# Altium PCB PCB2.PcbDoc
Units mm, origin at the board's own origin, x right, y up, seen from the top; angles counter-clockwise.
Board outline 43.5 x 43.5 mm, 2 copper layers (Top Layer, Bottom Layer), stack 1.57 mm thick; 59 components, 40 nets, 191 pads, 67 vias.
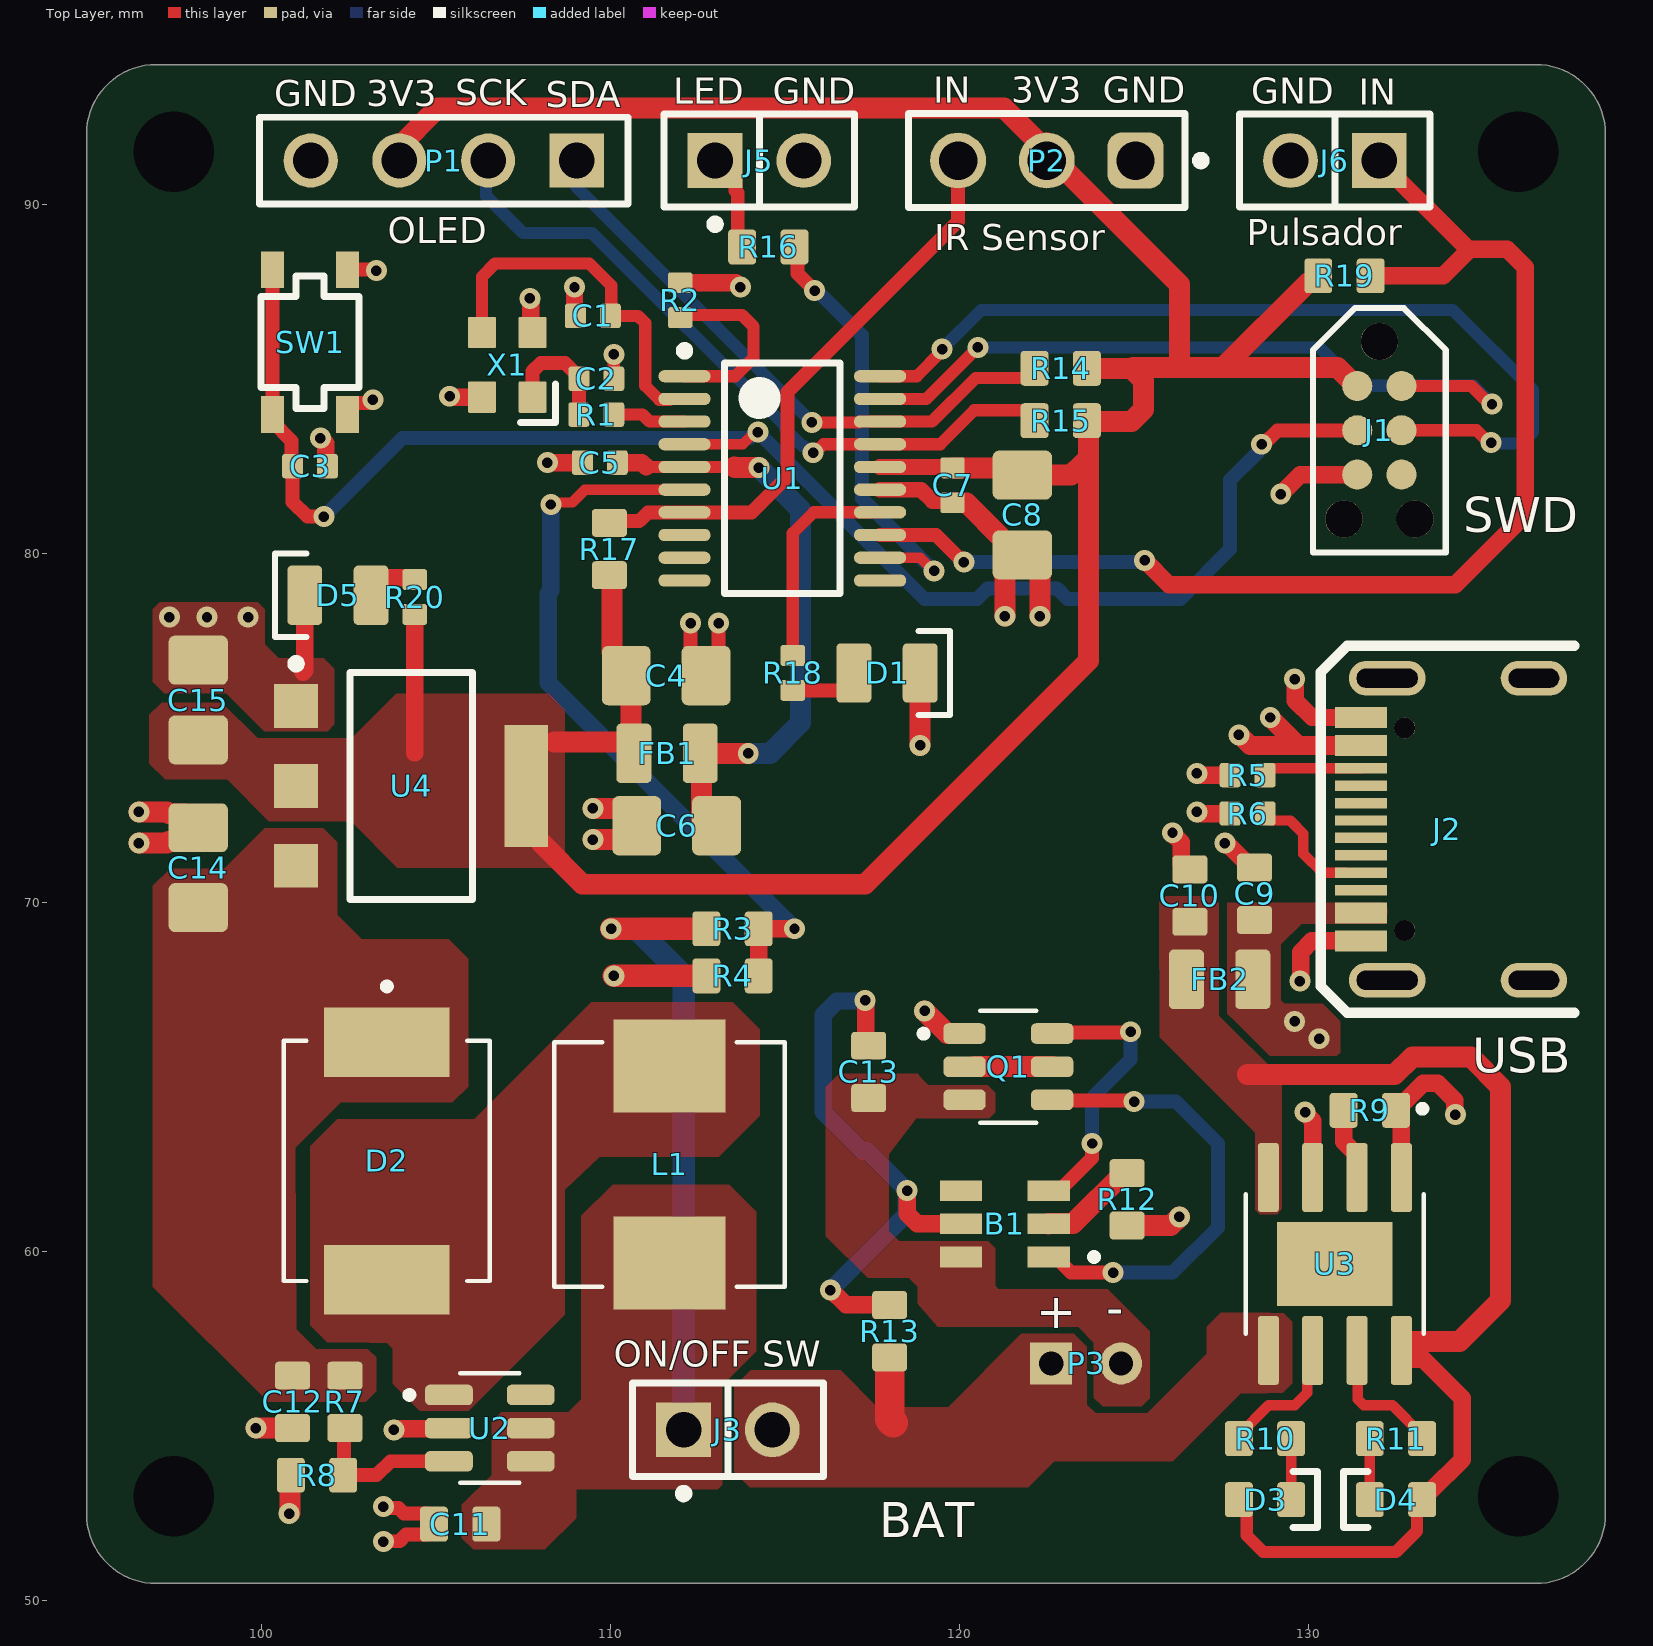
[diagram p0: Top Layer view]
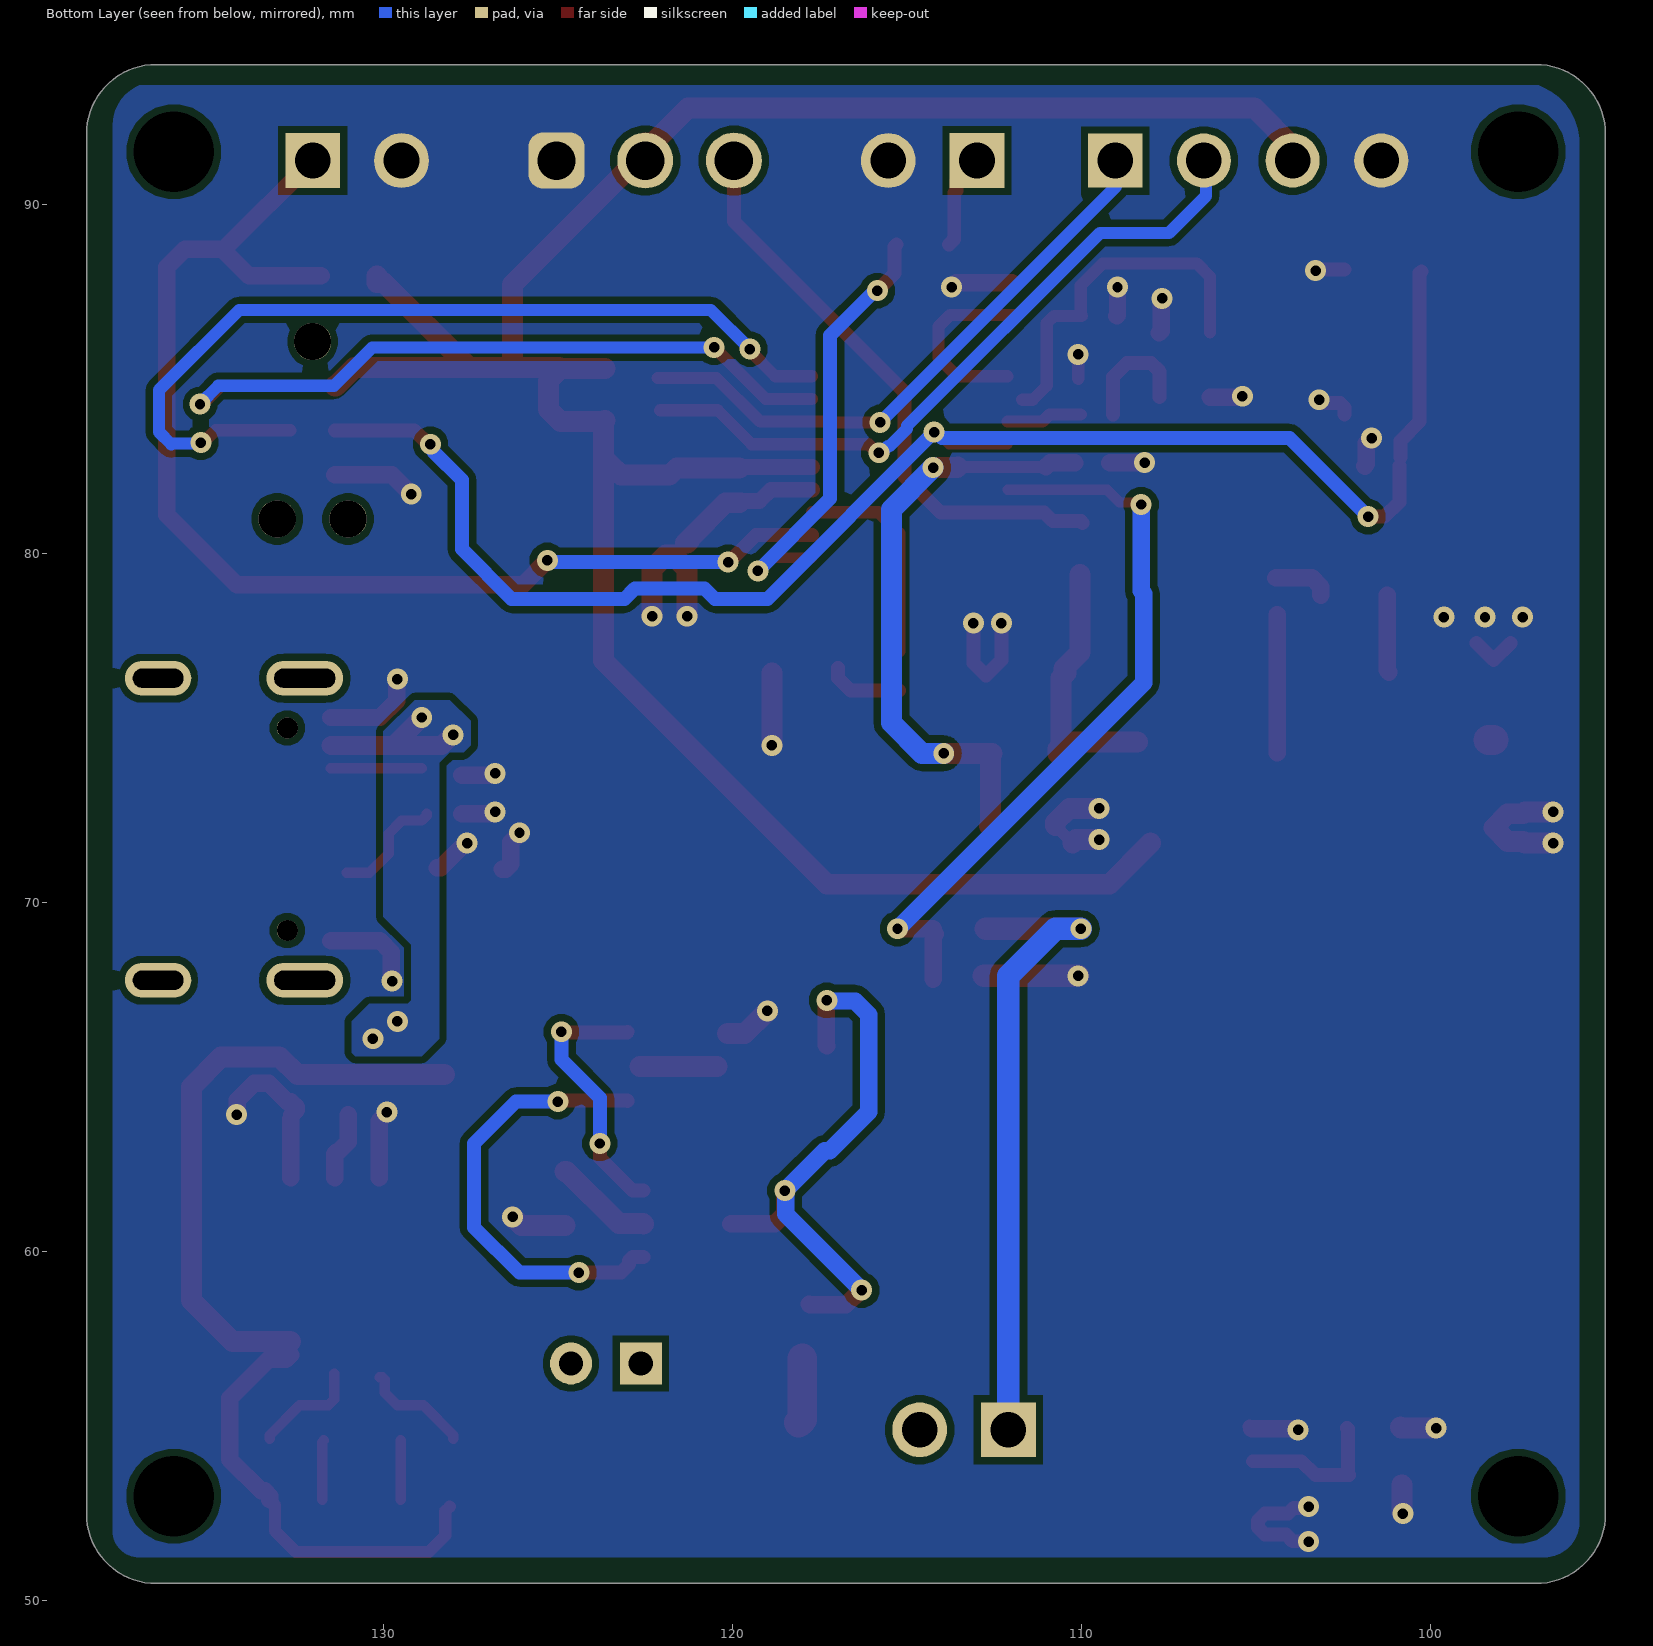
[diagram p1: Bottom Layer view, seen from below]
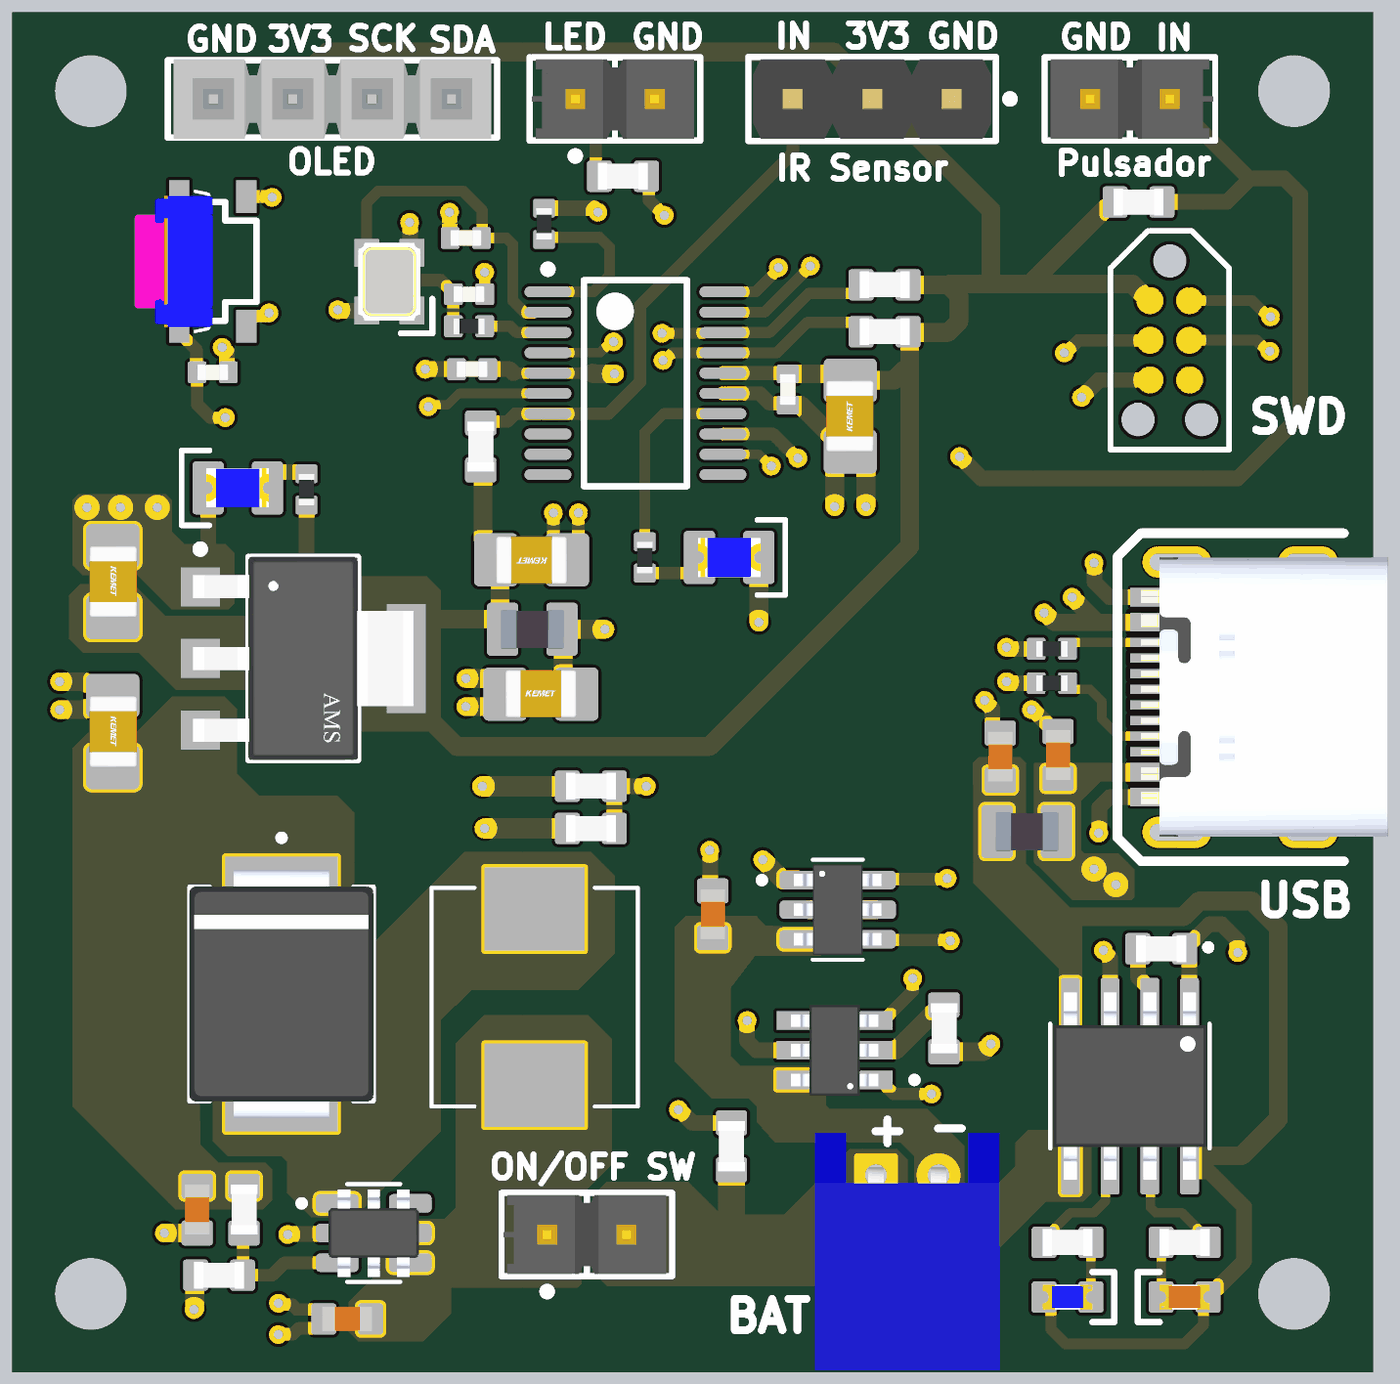
[diagram p2: 3D render of the assembled board from above, using the file's embedded part models]

## Layer stack, top to bottom
Top Solder: solder mask 0.0127, Solder Resist, Dk 3.5
Top Layer: signal copper 0.035
Dielectric 1: dielectric 1.5, FR-4, Dk 4.8
Bottom Layer: signal copper 0.035
Bottom Solder: solder mask 0.0127, Solder Resist, Dk 3.5

## Board outline
95,52.5 95,92 cw(c97,92) 97,94 136.5,94 cw(c136.5,92) 138.5,92 138.5,52.5 cw(c136.5,52.5) 136.5,50.5 97,50.5 cw(c97,52.5)

## Design rules (kind name [scope] priority, off if disabled: settings)
BoardOutlineClearance [All] p1: gap=0.2 ignorepadtopadclearanceinfootprint=FALSE
Clearance [All] p1: gap=0.2 ignorepadtopadclearanceinfootprint=FALSE
ComponentClearance [All] p1: gap=0.127 collisioncheckmode=3 verticalgap=0.127 showdistances=TRUE
DiffPairsRouting [All] p1: maxlimit=0.254 minlimit=0.127 mostfreqgap=0.127 toplayer_minwidth=0.127 toplayer_maxwidth=25.4 toplayer_prefwidth=0.127 bottomlayer_minwidth=0.127 bottomlayer_maxwidth=25.4 bottomlayer_prefwidth=0.127 maxuncoupledlength=12.7
Height [All] p1: minheight=0 maxheight=1816.048 prefheight=12.7
HoleSize [All] p1: absolutevalues=TRUE maxlimit=6.3 minlimit=0.3 maxpercent=80.000 minpercent=20.000
HoleToHoleClearance [All] p1: gap=0.25 allowstackedmicrovias=FALSE
MinimumAnnularRing [All] p1: minimumring=0.15
MinimumSolderMaskSliver [All] p1: minsoldermaskwidth=0
PlaneClearance [All] p1: clearance=0.127
PlaneConnect PlaneConnectPowerPads [InPadClass('PowerPads')] p1: planeconnectstyle=Direct reliefexpansion=0.508 reliefentries=4 reliefconductorwidth=0.254 reliefairgap=0.254
PlaneConnect [All] p2: planeconnectstyle=Direct reliefexpansion=0.3 reliefentries=4 reliefconductorwidth=0.127 reliefairgap=0.127
PolygonConnect PolygonConnectPowerPads [All vs (InPadClass('PowerPads'))] p1: connectstyle=Relief reliefconductorwidth=0.254 reliefentries=4 polygonreliefangle="90 Angle" airgapwidth=0.254
PolygonConnect [All] p2: connectstyle=Direct reliefconductorwidth=0.127 reliefentries=4 polygonreliefangle="90 Angle" airgapwidth=0.127
RoutingVias [All] p1: holewidth=0.3 width=0.6 viastyle="Through Hole" minholewidth=0.3 minwidth=0.6 maxholewidth=0.6 maxwidth=6.6
SilkToSilkClearance [All] p1: silktosilkclearance=0
SilkToSolderMaskClearance [IsPad] p1: minsilkscreentomaskgap=0.127 clearancetoexposedcopper=TRUE
SolderMaskExpansion SolderMaskExpansion_TENted [IsVia] p1: expansion=0.102 istentingtop=FALSE
SolderMaskExpansion [All] p2: expansion=0.102 istentingtop=FALSE
SupplyNets "Schematic Supply Nets_4" [InNet('+3V3A')] p1: voltage=0.000
SupplyNets "Schematic Supply Nets_3" [InNet('+5_IN')] p2: voltage=0.000
SupplyNets "Schematic Supply Nets_2" [InNet('GND')] p3: voltage=0.000
SupplyNets "Schematic Supply Nets_1" [InNet('+5')] p4: voltage=0.000
SupplyNets "Schematic Supply Nets" [InNet('+3V3')] p5: voltage=0.000
UnRoutedNet [All] p1: checkbadconnections=TRUE
Width [All] p1: maxlimit=1 minlimit=0.2 preferedwidth=0.3 minimp=50.000000 maximp=50.000000 favimp=50.000000
19 further rules are at their usual default settings.

## Classes and differential pairs
component class MCU: C1 C2 C3 C4 C5 C6 C7 C8 D1 FB1 J1 R1 R2 R3 R4 R18 SW1 U1
component class Conectors: J5 J6 P1 P2 R14 R15 R16 R17 R19
component class Battery_Management: B1 C9 C10 C11 C12 C13 C14 C15 D2 D3 D4 D5 FB2 J2 J3 L1 Q1 R5 R6 R7 R8 R9 R10 R11 R12 R13 R20 U2 U3 U4

## Components (designator, comment, footprint, x,y, rotation, side; value= is the part's Value field where it differs from the comment)
B1 "FS312F-G" SOT95P280X145-6N#1 121.3,60.8 r180 top
C1 "12 pF" CAP_0402 109.5,86.8 r180 top
C2 "12 pF" CAP_0402 109.6,85 r0 top
C3 "100 nF" CAP_0402 101.4,82.5 r0 top
C4 "1 uF" CAP_0805 111.6,76.5 r180 top
C5 "10 nF" CAP_0402 109.7,82.6 r0 top
C6 "1 uF" CAP_0805 111.9,72.2 r0 top
C7 "100 nF" CAP_0402 119.8,81.95 r90 top
C8 "1 uF" CAP_0805 121.8,81.1 r90 top
C9 "100n" CAP_0603 128.45,70.25 r270 top
C10 "100n" CAP_0603 126.6,70.2 r270 top
C11 "22u" CAP_0603 105.7,52.2 r180 top
C12 "22u" CAP_0603 100.9,55.7 r270 top
C13 "0.1u" CAP_0603 117.4,65.15 r90 top
C14 "10u" CAP_0805 98.2,71 r270 top
C15 "22u" CAP_0805 98.2,75.8 r270 top
D1 "BLUE" LED_0805_BLUE 117.925,76.575 r180 top
D2 "SS34" DIO_SS34 103.6,62.6 r270 top
D3 "BLUE" LED_0603_BLUE 128.75,52.9 r180 top
D4 "RED" LED_0603_RED 132.5,52.9 r0 top
D5 "BLUE" LED_0805_BLUE 102.2,78.8 r0 top
FB1 "120R" FB_0805 111.625,74.275 r0 top
FB2 "120R" FB_0805 127.45,67.8 r180 top
J1 "TC2030-NL" TC2030-NL-FP 132.025,83.525 r270 top
J2 "TYPE-C-31-M-12" TYPE-C-31-M-12 134.35,72.1 r90 top
J3 "TSW-102-14-G-S" FP-TSW-102-14-G-S-MFG 113.37,54.9 r0 top
J5 "TSW-102-14-G-S" FP-TSW-102-14-G-S-MFG 114.27,91.25 r0 top
J6 "TSW-102-14-G-S" FP-TSW-102-14-G-S-MFG 130.75,91.25 r180 top
L1 "MWSA0603S-220MT" INDM7066X300N 111.7,62.5 r90 top
P1 "HMTSW-104-23-F-S-237" SMTC-HMTSW-104-23-X-S-237 109.04,91.25 r180 top
P2 "61300311121" 61300311121 122.5,91.25 r180 top
P3 "S2B-PH-K-S(LF)(SN)" JST-S2B-PH-K-S_V 123.625,54.35 r0 top
Q1 "FS8205" SOT95P280X145-6N#2 121.4,65.3 r0 top
R1 "0R" RES_0402 109.6,83.975 r180 top
R2 "100K" RES_0402 112,87.25 r90 top
R3 "100k" RES_0603 113.5,69.25 r180 top
R4 "100k" RES_0603 113.5,67.9 r0 top
R5 "5.1k" RES_0402 128.25,73.65 r0 top
R6 "5.1k" RES_0402 128.25,72.55 r0 top
R7 "160k" RES_0603 102.4,55.7 r90 top
R8 "22K" RES_0603 101.6,53.6 r0 top
R9 "1.3K" RES_0603 131.75,64.05 r180 top
R10 "1K" RES_0603 128.75,54.65 r0 top
R11 "1K" RES_0603 132.5,54.65 r180 top
R12 "2K" RES_0603 124.8,61.5 r90 top
R13 "100" RES_0603 118,57.725 r270 top
R14 "4.7K" RES_0603 122.9,85.3 r0 top
R15 "4.7K" RES_0603 122.9,83.8 r0 top
R16 "120" RES_0603 114.525,88.775 r180 top
R17 "12K" RES_0603 109.975,80.125 r90 top
R18 "270R" RES_0402 115.225,76.575 r270 top
R19 "4.7K" RES_0603 131.025,87.95 r0 top
R20 "270R" RES_0402 104.4,78.75 r90 top
SW1 "SKRPANE010" SKRPANE010 101.4,86.05 r90 top
U1 "STM32F030F4P6" STM-TSSOP20_L 114.925,82.15 r0 top
U2 "MT3608" SOT95P280X145-6N#3 106.55,54.95 r0 top
U3 "TP4056" SOP127P600X175-9N 130.75,59.65 r270 top
U4 "AMS1117-3.3" FP-AMS1117-IPC_C 104.295,73.34 r0 top
X1 "12 MHZ" XTAL_2520 107.05,85.4 r90 top

## Footprints (in the part's own frame and the unit in brackets; to place one, negate y for a bottom-side part, rotate by r counter-clockwise, add the part's x,y. Pads: shape width x height; smd on the part's side, far side on the other; paste and mask are expansions set on the pad)
61300311121 [mm] "Pin Header, pitch 2.54 mm, THT, Vertical, single row, 3p"
  rrect50% 1.6x1.6 hole 1.1: 1(-2.54,0)
  round 1.6 hole 1.1: 2(0,0) 3(2.54,0)
  silkscreen extent -4.53,-1.35 3.96,1.35, body extent -3.81,-1.27 3.81,1.27, height 8.57
CAP_0402 [mm]
  rrect25% 0.6x0.7 smd: 1(-0.5,0) 2(0.5,0)
  body extent -0.5,-0.26 0.5,0.26, height 0.37
CAP_0603 [mm]
  rrect25% 0.8x1 smd: 1(-0.75,0) 2(0.75,0)
  body extent -0.8,-0.4 0.8,0.4, height 0.51
CAP_0805 [mm]
  rrect25% 1.4x1.7 smd: 1(-1.143,0) 2(1.143,0)
  body extent -1.15,-0.76 1.15,0.79, height 1.01
DIO_SS34 [mm]
  rect 2x3.6 smd: A(3.4,0) C(-3.4,0)
  silkscreen extent -5.1,-2.95 3.44,2.95, body extent -3.98,-2.95 3.98,2.95, height 2.65
FB_0805 [mm]
  rrect25% 1x1.7 smd: 1(-0.95,0) 2(0.95,0)
  body extent -1,-0.63 1,0.63, height 0.86
FP-AMS1117-IPC_C [mm]
  rect 1.25x1.25 smd paste+0 mask+0: 1(-3.295,2.29) 2(-3.295,0) 3(-3.295,-2.29)
  rect 1.25x3.5 smd paste+0 mask+0: 4(3.295,0)
  silkscreen extent -3.42,-3.25 1.75,3.62, body extent -3.9,-3.35 3.9,3.35, height 0.25
FP-TSW-102-14-G-S-MFG [mm]
  rect 1.57x1.57 hole 1.02 paste-2539.97 mask+0: 1(-1.27,0)
  round 1.57 hole 1.02 paste-2539.97 mask+0: 2(1.27,0)
  silkscreen extent -2.73,-1.95 2.73,1.34, body extent -2.83,-1.44 2.83,1.44, height 0.25
INDM7066X300N [mm]
  rect 2.67x3.21 smd: 1(-2.82,0) 2(2.82,0)
  silkscreen extent -3.5,-3.3 3.5,3.3
JST-S2B-PH-K-S_V [mm] "THD, 2-Leads, Body 7.6x5.9mm, Pitch 2mm"
  rect 1.2x1.2 hole 0.7: 1(-1,2.45)
  round 1.2 hole 0.7: 2(1,2.45)
  body extent -2.95,-3.8 2.95,3.8, height 4.8
LED_0603_BLUE [mm]
  rrect25% 0.8x1 smd: A(0.75,0) K(-0.75,0)
  silkscreen extent -1.5,-0.8 -0.8,0.8, body extent -0.8,-0.4 0.8,0.4, height 0.6
LED_0603_RED [mm]
  rrect25% 0.8x1 smd: A(0.75,0) K(-0.75,0)
  silkscreen extent -1.5,-0.8 -0.8,0.8, body extent -0.8,-0.4 0.8,0.4, height 0.6
LED_0805_BLUE [mm]
  rrect25% 1x1.7 smd: A(0.95,0) K(-0.95,0)
  silkscreen extent -1.8,-1.2 -0.9,1.2, body extent -1,-0.63 1,0.63, height 1.12
RES_0402 [mm]
  rrect25% 0.6x0.7 smd: 1(-0.5,0) 2(0.5,0)
  body extent -0.5,-0.25 0.5,0.25, height 0.3
RES_0603 [mm]
  rrect25% 0.8x1 smd: 1(-0.75,0) 2(0.75,0)
  body extent -0.8,-0.43 0.8,0.43, height 0.52
SKRPANE010 [mm]
  rect 1.05x0.65 smd: 12(-2.075,1.075) 12(2.075,1.075) 34(-2.075,-1.075) 34(2.075,-1.075)
  silkscreen extent -1.9,-1.4 1.9,1.4, body extent -2.3,-1.6 2.3,1.6, height 2.51
SMTC-HMTSW-104-23-X-S-237 [mm] "Terminal Strip, 1x2 Pins, Vertical, 2.54mm Pitch, Male"
  rect 1.55x1.55 hole 1.02: 1(0,0)
  round 1.55 hole 1.02: 2(2.54,0) 3(5.08,0) 4(7.62,0)
  silkscreen extent -1.46,-1.24 9.08,1.24, body extent -1.27,-1.27 8.89,1.27, height 8.56
SOP127P600X175-9N [mm]
  rrect25% 1.97x0.6 smd: 1(-2.475,1.905) 2(-2.475,0.635) 3(-2.475,-0.635) 4(-2.475,-1.905) 5(2.475,-1.905) 6(2.475,-0.635) 7(2.475,0.635) 8(2.475,1.905)
  rect 2.413x3.302 smd paste-3: 9(0,0)
  silkscreen extent -4.54,-2.55 2,2.6, body extent -3,-2.45 3,2.45, height 1.75
SOT95P280X145-6N#1 [mm]
  rect 1.21x0.59 smd: 1(-1.255,0.95) 2(-1.255,0) 3(-1.255,-0.95) 4(1.255,-0.95) 5(1.255,0) 6(1.255,0.95)
  silkscreen extent -2.66,0.85 -2.46,1.05, body extent -1.4,-1.45 1.4,1.45, height 1.45
SOT95P280X145-6N#2 [mm]
  rrect50% 1.21x0.59 smd: 1(-1.255,0.95) 2(-1.255,0) 3(-1.255,-0.95) 4(1.255,-0.95) 5(1.255,0) 6(1.255,0.95)
  silkscreen extent -2.53,-1.6 0.8,1.6, body extent -1.4,-1.45 1.4,1.45, height 1.45
SOT95P280X145-6N#3 [mm]
  rrect50% 1.37x0.59 smd: 1(-1.17,0.95) 2(-1.17,0) 3(-1.17,-0.95) 4(1.17,-0.95) 5(1.17,0) 6(1.17,0.95)
  silkscreen extent -2.4,-1.57 0.85,1.57, body extent -1.45,-1.4 1.45,1.4, height 1.45
STM-TSSOP20_L [mm] "SOP, 20-Leads, Body 6.6x4.5mm, Pitch 0.65mm, IPC High Density"
  oval 1.5x0.35 smd: 1(-2.8,2.925) 2(-2.8,2.275) 3(-2.8,1.625) 4(-2.8,0.975) 5(-2.8,0.325) 6(-2.8,-0.325) 7(-2.8,-0.975) 8(-2.8,-1.625) 9(-2.8,-2.275) 10(-2.8,-2.925) 11(2.8,-2.925) 12(2.8,-2.275) 13(2.8,-1.625) 14(2.8,-0.975) 15(2.8,-0.325) 16(2.8,0.325) 17(2.8,0.975) 18(2.8,1.625) 19(2.8,2.275) 20(2.8,2.925)
  silkscreen extent -2.92,-3.3 1.65,3.77, body extent -2.25,-3.3 2.25,3.3, height 1.2
TC2030-NL-FP [mil]
  round 33.98 smd paste-16.99: 1(-50,-25) 2(-50,25) 3(0,-25) 4(0,25) 5(50,-25) 6(50,25)
  round 42.01 hole 42.01 unplated: MH(-100,0) MH(100,40) MH(100,-40)
  silkscreen extent -138,-75 138,75
TYPE-C-31-M-12 [mm]
  rect 0.6x1.5 smd mask+0.07: A1B12(-3.2,2.85) B1A12(3.2,2.85)
  rect 0.6x1.5 smd mask+0.14: A4B9(-2.4,2.85) B4A9(2.4,2.85)
  rect 0.3x1.5 smd mask+0.14: A5(-1.25,2.85) A6(-0.25,2.85) A7(0.25,2.85) A8(1.25,2.85) B5(1.75,2.85) B6(0.75,2.85) B7(-0.75,2.85) B8(-1.75,2.85)
  round 0.6 hole 0.6 unplated mask+0.3: MH(-2.9,1.6) MH(2.9,1.6)
  oval 1x1.9 hole 0.55 slot 1.45 at 90 deg mask+0.05: SH(-4.325,-2.1) SH(4.325,-2.1)
  oval 1x2.2 hole 0.55 slot 1.75 at 90 deg mask+0.05: SH(-4.325,2.1) SH(4.325,2.1)
  silkscreen extent -5.25,-3.25 5.25,4, body extent -4.47,-4.65 4.47,3.25, height 3.32
XTAL_2520 [mm]
  rrect10% 0.9x0.8 smd mask+0: 1(-0.925,-0.725) 2(0.925,-0.725) 3(0.925,0.725) 4(-0.925,0.725)
  silkscreen extent -1.65,-1.37 -0.55,-0.37, body extent -1.25,-1 1.25,1, height 0.8

## Part data
B1: "One Cell Lithium-ion/Polymer Battery Protection IC", Manufacturer_Name="Fortune Semiconductor Corporation", Datasheet Link=https://www.ic-fortune.com/upload/Download/FS312F-G-DS-12_EN.pdf, Geometry.Height=1.45mm, Manufacturer_Part_Number=FS312F-G
C1 C2 C3 C5 C7: library part CAP_0402, "Capacitor SMD 0402"
C4 C6 C8 C14 C15: library part CAP_0805, "Capacitor SMD 0805"
C9 C10 C11 C12 C13: library part CAP_0603, "Capacitor SMD 0603"
D1 D5: library part LED_0805_BLUE, "LED 0805 BLUE SMD"
D2: "3A, 40V, Schottky Rectifier", Package="DO-214AB-2 Taiwan Semiconductor", Check_prices=https://www.snapeda.com/parts/SS34/Taiwan+Semiconductor/view-part/?ref=eda, MF="Taiwan Semiconductor", MP=SS34, SnapEDA_Link=https://www.snapeda.com/parts/SS34/Taiwan+Semiconductor/view-part/?ref=snap
D3: library part LED_0603_BLUE, "LED 0603 BLUE SMD"
D4: library part LED_0603_RED, "LED 0603 RED SMD"
FB1: library part FB_0805, "Ferrite Bead SMD 0805GZ2012D121TF", Manufacturer Part Number=PZ2012D121-3R0TF
FB2: library part FB_0805, "Ferrite Bead SMD 0805", Manufacturer Part Number=PZ2012D121-3R0TF
J1: "Tag-Connect No-Solder SWD Debug Connector (No Legs) DO NOT PLACE", Manufacturer=Tag-Connect, Manufacturer Part Number=TC2030-NL-FP
J2: "USB Type C Connector Horizontal SMT", Manufacturer="Koren Hroparts", Manufacturer Part Number=TYPE-C-31-M-12
J3 J5 J6: library part CMP-02766-001740-1, "CONN HEADER VERT 2POS 2.54MM", Color=Black, Flammability Rating="UL94 V-0", Max Current Rating=7.6A, Max Operating Temperature=125°C, Max Voltage Rating (AC)=550V, Min Operating Temperature=-55°C, Package Quantity=1, Connector Type=Header, Contact Finish - Mating=GOLD, Contact Material=Bronze, Contact Mating Length=0.32inch, Contact Plating=Gold, Contact Shape=Square, Contact Type="Male Pin", Depth=2.54mm, Fastening Type=Pull, Gender=Male, Housing Color=Black, Housing Material=Polyester, Insulation Color=Black, Insulation Material=PBT, Lead Free="Lead Free", Length=5.08mm, Mount="Through Hole", Number of Contacts=2, Number of Positions=2, Number of Rows=1, Orientation=Straight, Packaging=Bulk, Pitch=2.54mm, Radiation Hardening=No, REACH SVHC="No SVHC", RoHS Compliant=Yes, Series=TSW, Termination=Solder, Width=2.54mm
L1: "22 ÂµH Unshielded Drum Core, Wirewound Inductor 2.5 A 170mOhm Max Nonstandard -", Package=None, Check_prices=https://www.snapeda.com/parts/MWSA0603S-220MT/Shenzhen+Huacan+Tianlu+Electronics+Co.%252C+Ltd./view-part/?ref=eda, MF="Shenzhen Sunlord Electronics Co., Ltd.", MP=MWSA0603S-220MT, SnapEDA_Link=https://www.snapeda.com/parts/MWSA0603S-220MT/Shenzhen+Huacan+Tianlu+Electronics+Co.%252C+Ltd./view-part/?ref=snap
P1: library part CMP-1024-00021-1, "Modified .025\" SQ Post Header, Through-hole, Vertical, -55 to 125 degC, 2.54 mm Pitch, 4-Pin, Male, RoHS", Manufacturer=Samtec, Temperature Range="-55 to 125 degC", ComponentLink1Description="Manufacturer URL", ComponentLink1URL=http://www.samtec.com, ComponentLink2Description=Datasheet, ComponentLink2URL=http://www.samtec.com/documents/webfiles/pdf/HMTSW.PDF, ComponentLink3Description="Package Specification", ComponentLink3URL=http://www.samtec.com/documents/webfiles/cpdf/HMTSW-XXX-XX-X-X-XXXX-XX-XX-MKT1.pdf, DatasheetVersion=F-214, Mounting Technology=Through-hole, Orientation=Vertical, PackageDescription="Assembly .025 [.64] SQ. Post Hi-Temp Terminal Strip", PackageReference=HMTSW-104-23-X-S-237, PackageVersion="AL, 3/1987", PartNumber=HMTSW-104-23-F-S-237, Pitch="2.54 mm", RoHS=True
P2: library part CMP-1502-01062-3, Color=Black, Contact Resistance=20mΩ, Current Rating=3A, Max Operating Temperature=105°C, Min Operating Temperature=-40°C, Operating Supply Voltage=250V, Connector Type="Male Pin", Contact Material=Copper, Contact Mating Length=5.9944mm, Contact Plating=Gold, Gender=Male, Height=8.94mm, Lead Free="Lead Free", Lead Pitch=2.54mm, Mount="Through Hole", NexarPartId=32855521, Number of Contacts=3, Number of Pins=3, Number of Positions=3, Number of Rows=1, Orientation=Vertical, Packaging=Bulk, Pitch=2.54mm, REACH SVHC=Unknown, RoHS=Compliant, Termination=Solder, Voltage Rating=250V
P3: library part CMP-1755-00004-1, "Male Header, Pitch 2 mm, 1 x 2 Position, Height 4.8 mm, Tail Length 3.4 mm, -25 to 85 degC, RoHS, Bulk", Capacitance="10 uF", Case\Package=Radial, Max Operating Temperature="85 degC", Min Operating Temperature="-40 degC", Package Quantity=200, Tolerance=20%, Voltage Rating="50 V", ComponentLink1Description=Datasheet, ComponentLink1URL=http://www.jst-mfg.com/product/pdf/eng/ePH.pdf, DatasheetVersion=Dec-12, Diameter="5 mm", Height="11 mm", Lead Pitch="2 mm", Length="11 mm", Mount="Through Hole", PackageDescription="Male Header, Pitch 2 mm, 1 x 2 Position, Height 4.8 mm, Tail Length 3.4 mm", PackageReference=S2B-PH-K-S, Packaging=Bulk, Pins=2, Radiation Hardening=No, REACH SVHC="No SVHC", RoHSCompliant=true, Voltage Rating (DC)="50 V"
Q1: "ÐœÐžÐŸ-Ñ‚Ñ€Ð°Ð½Ð·Ð¸ÑÑ‚Ð¾Ñ€ Ñ Ð´Ð²Ð¾Ð¹Ð½Ñ‹Ð¼ N-ÐºÐ°Ð½Ð°Ð»ÑŒÐ½Ñ‹Ð¼ Ñ€ÐµÐ¶Ð¸Ð¼Ð¾Ð¼ ÑƒÑÐ¸Ð»ÐµÐ½Ð¸Ñ Ð¼Ð¾Ñ‰Ð½Ð¾ÑÑ‚Ð¸", Package=Package, Check_prices=https://www.snapeda.com/parts/FS8205/Fortune+Semiconductor/view-part/?ref=eda, MF="Fortune Semiconductor", MP=FS8205, SnapEDA_Link=https://www.snapeda.com/parts/FS8205/Fortune+Semiconductor/view-part/?ref=snap
R1 R2 R5 R6 R18 R20: library part RES_0402, "Resistor SMD 0402"
R3 R4 R7 R8 R9 R10 R11 R12 R13 R14 R15 R16 R17 R19: library part RES_0603, "Resistor SMD 0603"
SW1: "Tactile Switch SMD SPST", Manufacturer="Alps Alpine", Manufacturer Part Number=SKRPANE010
U1: library part CMP-0304-00039-2, "ARM Cortex-M0 32-bit MCU, 16 KB Flash, 4 KB Internal RAM, 15 I/Os, 20-pin TSSOP, -40 to 85 degC, Tube", I/Os (High Current)=15, Operating Frequency(F) (Processor speed) (MHz)=48, Supply Voltage(Vcc) min (V)=2.4, ComponentLink1Description="Manufacturer URL", ComponentLink1URL=http://www.st.com/web/en/home.html, ComponentLink2Description=Datasheet, ComponentLink2URL=http://www.st.com/st-web-ui/static/active/en/resource/technical/document/datasheet/DM00088500.pdf, ComponentLink3Description="Package Specification", ComponentLink3URL=http://www.st.com/st-web-ui/static/active/en/resource/technical/document/datasheet/DM00065136.pdf, Core="ARM Cortex-M0", DatasheetVersion="Rev. 1", FLASH Size (Prog) (kB)=16, Internal RAM Size (kB)=4, Mounting Technology="Surface Mount", PackageDescription="20-Pin Thin Shrink Small Outline Package, 6.5 x 4.4 mm Body, 0.65 mm Pitch", PackageReference=TSSOP20, PackageVersion="Rev. 1, 11/2012", Packing=Tube, PartNumber=STM32F030F4P6
U2: "High Efficiency 1.2MHz2A Step Up Converter", Package=Package, Availability="Not in stock", Check_prices=https://www.snapeda.com/parts/MT3608/Aerosemi+Technology+Co.%252C+Ltd/view-part/?ref=eda, MF="Aerosemi Technology Co., Ltd", MP=MT3608, Price=None, SnapEDA_Link=https://www.snapeda.com/parts/MT3608/Aerosemi+Technology+Co.%252C+Ltd/view-part/?ref=snap
U3: "Complete single cell Li-Ion battery with a constant current / constant voltage linear charger", Package=Package, Availability="Not in stock", Check_prices=https://www.snapeda.com/parts/TP4056/NanJing+Top+Power+ASIC+Corp./view-part/?ref=eda, MF="NanJing Top Power ASIC Corp.", MP=TP4056, Price=None, SnapEDA_Link=https://www.snapeda.com/parts/TP4056/NanJing+Top+Power+ASIC+Corp./view-part/?ref=snap
U4: library part CMP-209535-000001-1, "LDO Voltage Regulators 1A, 3.3V", Dropout Voltage=1.1V, Manufacturer="Advanced Monolithic Systems", Max Junction Temp=+125°C, Max Power Dissipation=1.2W, Max Supply Voltage=15V, Nominal Supply Current=5mA, Output Current=1A, Output Voltage=3.3V, Package=AMS1117, Temperature="-40°C to +125°C", Temperature Range Low=-40°C, Automotive=No, Category=IC, ComponentLink2Description=Datasheet, ComponentLink2URL=http://www.advanced-monolithic.com/pdf/ds1117.pdf, Device Class L1="Integrated Circuits (ICs)", Device Class L2="Power Management ICs", Device Class L3="Voltage Regulators - Linear", Height=1.8mm, Ipc Land Pattern Name=SOT229P700X180-4, Lead Free=Yes, Manufacturer Part Number=AMS1117-3.3, Number Of Outputs=1, Octopart=https://octopart.com/ams1117-3.3-advanced+monolithic+systems-25899300, Output Type=Fixed, RoHS=TRUE, Standoff Height=0.64mm, Temperature Range High=+125°C
X1: library part XTAL_2520, "Crystal SMD 2520", Manufacturer Part Number=HY12MSMD2520FA1R30

## Free pads (board coordinates)
  round 1.524 hole 2.3 unplated: MH(97.5,53) MH(97.5,91.5) MH(136,53) MH(136,91.5)

## Via types
v1: diameter 0.6, hole 0.3, Top Layer to Bottom Layer, 67 vias

## Nets (pads, with @x,y where several pads share a name; then routed paths per layer and width w, separated by ;. In a path a pad name is that pad's centre, name@x,y a point inside that pad or via, vN(x,y) a via of type N, cw(c..) or ccw(c..) an arc to the next point about the centre after c; other vN are vias at no path point)
+3V3: C4.2 C7.2 C8.2 C15.2 FB1.1 J1.1 P1.3 P2.2 R14.2 R15.2 R17.1 R19.1 R20.1 U1.16 U4.2 U4.4 | length 85.6
  Top Layer w0.45: U1.16 C7.2@119.775,82.475
  Top Layer w0.5: 104.4,74.284 R20.1
  Top Layer w0.6: P1.3@103.9,91.6 105.05,92.75 121.276,92.75 122.276,91.75 P2.2@122.521,91.75 ; U4.4@108.025,71.7 109.2,70.525 117.3,70.525 123.7,76.925 123.7,83.75 R15.2@123.675,83.775 ; 108.4,74.6 110.475,74.6 110.675,74.4 FB1.1 110.591,74.359 110.591,76.434 C4.2@110.45,76.575 ; R17.1@110.05,79.4 110.05,77.157 110.507,76.7 C4.2@110.507,76.55 ; C7.2 121.593,82.45 C8.2 123.199,82.243 123.55,82.594 ; P2.2@122.5,91.5 126.3,87.7 126.3,85.525 ; R15.2 R15.2@123.675,83.775 ; R14.2 124.924,85.3 124.937,85.287 125.275,84.949 125.275,84.126 124.924,83.775 R15.2@123.675,83.775 ; 124.975,85.325 126.35,85.325 127.55,85.325 ; R19.1@130.175,87.95 130.175,87.75 129.975,87.75 127.55,85.325 ; J1.1 131.362,84.795 130.832,85.325 127.55,85.325
  Top Layer w0.85: C15.2 C15.2@98.35,74.657
+3V3A: C5.2 C6.2 FB1.2 U1.5 | length 17.3
  Top Layer w0.35: 111.025,82.475 U1.5 113.575,82.475 113.6,82.5
  Top Layer w0.5: C5.2 110.9,82.6 111.025,82.475
  Top Layer w0.6: C6.2@112.643,72.2 112.609,72.234 112.609,74.241 FB1.2 v1(113.95,74.275) ; 113.55,82.475 113.57,82.455 v1(114.255,82.455)
  Bottom Layer w0.6: v1(113.95,74.275) 114.575,74.275 115.45,75.15 115.45,81.26 v1(114.255,82.455)
+5: C12.1 C14.2 D2.C R7.2 U4.3
+5_IN: C10.2 D3.A D4.A FB2.2 U3.4 U3.8 | length 30.1
  Top Layer w0.35: D3.A@128.1,52.7 128.225,52.575 128.225,51.875 128.7,51.4 132.5,51.4 133.1,52 133.1,52.75 D4.A
  Top Layer w0.5: U3.8@132.655,57.05 132.78,56.925 133.275,56.925 134.4,55.8 134.4,54.05 133.5,53.15 133.4,53.15 133.25,53 D4.A
  Top Layer w0.6: 128.25,65.075 132.464,65.075 132.97,65.58 134.643,65.58 135.5,64.724 135.5,58.6 134.325,57.425 U3.8@132.655,57.425
BAT_IN_NEG: B1.6 C13.1 P3.2 Q1.3
BAT_IN_POS: J3.2 P3.1 R13.2 U3.5 | length 1.9
  Top Layer w0.85: R13.2@118,56.95 118,55.2 118.1,55.1
GND: C1.2 C2.2 C3.2 C4.1 C5.1 C6.1 C7.1 C8.1 C9.1 C10.1 C11.2 C12.2 C14.1 C15.1 D1.K D5.K J1.5 J2.A1B12 J2.B1A12 J5.2 J6.2 P1.4 P2.1 Q1.1 R2.2 R4.1 R5.1 R6.1 R8.1 R9.1 R12.1 SW1.34 U1.15 U2.2 U3.1 U3.3 U4.1 X1.2 X1.4 | length 64.4
  Top Layer w0.35: C2.2 v1(110.1,85.7) ; C6.1@110.257,71.7 C6.1
  Top Layer w0.4: C15.1@97.712,77.43 C15.1 C15.1@98.688,77.431 ; v1(100.8,52.5) v1@100.825,52.525 ; R8.1@100.825,53.325 R8.1@100.9,53.4 ; C12.2@100.875,54.975 C12.2 ; SW1.34@102.475,83.975 102.475,84.175 102.6,84.3 103.1,84.3 v1(103.2,84.4) ; SW1.34@102.475,88.125 103.275,88.125 v1(103.3,88.1) ; v1(103.5,51.7) 103.509,51.709 103.963,51.709 104.154,51.9 104.75,51.9 104.95,52.1 C11.2 104.95,52.3 104.75,52.5 104.09,52.5 103.928,52.662 103.538,52.662 v1(103.5,52.7) ; v1(103.8,54.9) v1@103.825,54.925 ; U2.2@105.125,54.925 U2.2@105.2,55 ; v1(112.3,78) 112.3,76.943 C4.1 113.1,76.857 v1(113.1,78)
  Top Layer w0.45: U1.15 118.9,81.825 119.225,81.5 C7.1@119.75,81.5
  Top Layer w0.5: 101.2,76.6 101.25,76.65 D5.K ; v1(101.7,83.3) 101.85,83.15 101.85,82.55 C3.2 ; v1@103.825,54.925 U2.2@105.125,54.925 ; v1(105.4,84.5) 105.425,84.475 X1.4 ; v1(107.7,87.3) 107.719,87.281 107.719,86.381 X1.2 ; v1(108.2,82.6) C5.1 ; v1(108.975,87.625) 108.975,86.825 C1.2 ; R2.2 113.6,87.75 v1(113.725,87.625) ; C7.1@119.75,81.5 C7.1 ; v1(126.1,72) 126.1,71.973 126.35,71.723 126.35,71.1 126.5,70.95 C10.1 ; v1(126.8,72.6) 126.85,72.55 R6.1 ; v1(126.8,73.7) 126.85,73.65 R5.1 ; v1(127.6,71.7) 127.619,71.681 127.669,71.681 128.35,71 C9.1 ; v1(129.2,81.7) 129.755,82.255 J1.5 ; v1(129.6,76.4) 129.619,76.381 129.619,75.781 130.1,75.3 J2.B1A12 ; v1(129.75,67.75) 129.769,67.769 129.769,68.576 130.093,68.9 J2.A1B12 ; v1(129.9,64) 129.9,63.973 130.115,63.758 U3.3 ; R9.1@132.625,63.925 R9.1 132.5,64.15 132.65,64.3 132.75,64.3 133.28,64.83 133.695,64.83 134.181,64.344 134.181,63.944 v1(134.2,63.925) ; U3.1 R9.1@132.655,63.795
  Top Layer w0.6: v1(96.5,71.7) 97.299,71.7 97.342,71.743 97.8,71.743 C14.1 97.8,72.543 97.356,72.543 97.299,72.6 v1(96.5,72.6) ; v1(99.85,54.95) 100.85,54.95 C12.2@100.875,54.975 ; v1@100.825,52.525 R8.1@100.825,53.325 ; v1(109.5,71.8) 110.157,71.8 C6.1@110.257,71.7 ; v1(109.5,72.7) 110.357,72.7 110.757,72.3 C6.1 ; v1(118.875,74.5) D1.K ; v1(119,66.9) 119.65,66.25 Q1.1 ; C7.1 120.2,81.45 121.25,80.4 121.25,80.357 121.307,80.3 C8.1@121.35,80.3 ; v1(121.3,78.2) 121.3,79.557 121.7,79.957 C8.1 ; C8.1@121.9,79.957 122.3,79.557 v1(122.3,78.2) ; R12.1 126.05,60.75 v1(126.3,61)
  Top Layer w0.65: v1(110.1,67.9) R4.1@112.8,67.9
  other v1: 97.375,78.175 98.45,78.175 99.625,78.175
MCU_BOOT: R2.1 U1.1 | length 5.4
  Top Layer w0.35: R2.1@111.975,86.825 113.775,86.825 114.1,86.5 114.1,85.6 113.575,85.075 U1.1
MCU_I2C_SDA: P1.1 R14.1 U1.18 | length 17.1
  Top Layer w0.35: v1(115.775,83.75) 117.125,83.75 117.15,83.775 119.213,83.775 120.463,85.025 R14.1@122.15,85.025
  Bottom Layer w0.35: P1.1@108.9,91.1 108.92,91.1 109.02,91 109.02,90.505 v1(115.775,83.75)
MCU_NRST: C3.1 J1.3 SW1.12 U1.4 | length 46
  Top Layer w0.3: U1.4 113.794,83.125 114.144,83.475 v1(114.225,83.475)
  Top Layer w0.4: SW1.12@100.275,88.075 100.325,88.025 100.325,83.975 100.325,83.775 100.875,83.225 C3.1@100.875,82.75 ; C3.1 100.9,81.475 101.325,81.05 v1(101.8,81.05) ; v1(128.65,83.125) 128.704,83.125 129.104,83.525 J1.3
  Bottom Layer w0.4: v1(101.8,81.05) 104.05,83.3 113.996,83.3 114.196,83.5 v1@114.225,83.5 ; v1(114.225,83.475) 119,78.7 120.5,78.7 120.8,79 122.8,79 123.1,78.7 126.325,78.7 127.75,80.125 127.75,82.1 128.575,82.925 128.575,82.996 128.612,83.033 v1@128.612,83.138
MCU_OSC_IN: C1.1 U1.2 X1.3 | length 10.3
  Top Layer w0.35: X1.3 106.325,87.925 106.7,88.3 109.4,88.3 110.025,87.675 110.025,87.1 C1.1@110.025,86.875 ; C1.1 110.795,86.8 111,86.595 111,84.8 111.4,84.4 U1.2@111.7,84.4
MCU_OSC_OUT: R1.1 U1.3 | length 2.2
  Top Layer w0.35: R1.1@110.025,83.975 110.925,83.975 111.125,83.775 U1.3
MCU_SWCLK: J1.4 U1.20 | length 25.7
  Top Layer w0.35: U1.20 118.775,85.075 119.5,85.8 v1(119.5,85.85) ; J1.4 134.807,83.525 135.157,83.175 v1(135.225,83.175)
  Bottom Layer w0.35: v1(119.5,85.85) 120.624,86.974 134.126,86.974 136.425,84.675 136.425,83.475 136.075,83.125 136.05,83.15 135.3,83.15 v1@135.275,83.125
MCU_SWDIO: J1.2 U1.19 | length 21.6
  Top Layer w0.35: U1.19 119.05,84.425 v1(120.525,85.9) ; J1.2 134.662,84.795 135.182,84.275 v1(135.25,84.275)
  Bottom Layer w0.35: v1(120.525,85.9) 130.316,85.9 131.416,84.8 134.725,84.8 v1(135.25,84.275)
MCU_VBAT: R3.1 R4.2 U1.6 | length 21.4
  Top Layer w0.3: v1(108.3,81.4) 108.357,81.457 108.907,81.457 109.275,81.825 U1.6
  Top Layer w0.5: R3.1@114.2,69.1 114.25,69.05 R4.2 R4.2@114.25,67.8 ; R3.1 v1(115.275,69.25)
  Bottom Layer w0.5: v1(108.3,81.4) 108.3,78.924 108.225,78.849 108.225,76.3 v1(115.275,69.25)
NetB1_1: B1.1 Q1.4 | length 13
  Top Layer w0.4: B1.1 122.865,59.85 122.96,59.755 122.96,59.634 123.194,59.4 v1(124.4,59.4) ; Q1.4@123,64.315 123.01,64.325 124.975,64.325 v1(125,64.3)
  Bottom Layer w0.4: v1(124.4,59.4) 126.1,59.4 127.4,60.7 127.4,63.1 126.2,64.3 v1(125,64.3)
NetB1_2: B1.2 R12.2 | length 2.9
  Top Layer w0.6: B1.2 122.56,60.805 123.255,60.805 124.75,62.3 R12.2@124.8,62.3
NetB1_3: B1.3 Q1.6 | length 7.6
  Top Layer w0.4: B1.3 122.865,61.75 123.8,62.685 v1(123.8,63.1) ; Q1.6@123,66.3 123.025,66.275 124.875,66.275 v1(124.9,66.3)
  Bottom Layer w0.4: v1(123.8,63.1) 123.8,64.4 124.9,65.5 v1(124.9,66.3)
NetB1_5: B1.5 C13.2 R13.1 | length 16.6
  Top Layer w0.5: v1(116.3,58.9) 116.327,58.9 116.75,58.477 117.777,58.477 R13.1@117.8,58.5 ; C13.2@117.3,65.9 117.319,65.919 117.319,67.181 v1(117.3,67.2) ; v1@118.5,61.723 118.5,61.093 118.793,60.8 B1.5
  Bottom Layer w0.5: v1(116.3,58.9) 118.481,61.081 118.481,61.723 v1@118.454,61.75 ; v1(117.3,67.2) 117.281,67.181 116.481,67.181 116.093,66.793 116.093,64.007 117.212,62.888 117.362,62.888 v1(118.5,61.75)
NetC2_1: C2.1 R1.2 X1.1 | length 3.4
  Top Layer w0.4: X1.1 107.775,85.216 108.009,85.45 108.7,85.45 C2.1@109.1,85.05 ; R1.2 C2.1
NetC9_2: C9.2 FB2.1 J2.A4B9 J2.B4A9 | length 4.8
  Top Layer w0.55: v1(128,74.8) 128.027,74.8 128.327,74.5 129.7,74.5 ; v1(128.9,75.3) 129.7,74.5 ; J2.B4A9 129.7,74.5
  other v1: 130.3,66.1 129.6,66.6
NetC11_1: C11.1 J3.1 L1.1 R3.2 U2.4 U2.5 | length 18.1
  Top Layer w0.65: v1(110.025,69.25) R3.2
  Bottom Layer w0.65: v1(110.025,69.25) 110.752,69.25 112.1,67.902 112.1,55.2 J3.1@112.075,55.175
NetD1_A: D1.A R18.2 | length 2.2
  Top Layer w0.4: R18.2 116.625,76.075 116.975,76.425 D1.A@116.975,76.725
NetD2_A: D2.A L1.2 U2.1
NetD3_K: D3.K R10.2 | length 1.7
  Top Layer w0.3: D3.K R10.2@129.5,54.6
NetD4_K: D4.K R11.2 | length 1.7
  Top Layer w0.3: R11.2@131.7,54.6 131.75,54.55 D4.K
NetD5_A: D5.A R20.2 | length 1.7
  Top Layer w0.5: D5.A 103.15,79.05 103.4,79.3 R20.2@104.449,79.3
NetJ2_A5: J2.A5 R6.2 | length 3.4
  Top Layer w0.3: R6.2 128.75,72.5 128.9,72.35 129.475,72.35 129.85,71.975 129.85,71.4 130.4,70.85 J2.A5@131.05,70.85
NetJ2_B5: J2.B5 R5.2 | length 2.6
  Top Layer w0.3: R5.2@128.9,73.85 J2.B5
NetJ5_1: J5.1 R16.2 | length 2.7
  Top Layer w0.4: J5.1@112.925,91.05 113.2,91.05 113.585,90.665 113.585,90.39 113.65,90.325 113.65,89 R16.2@113.8,88.85
NetJ6_1: J6.1 R19.2 U1.13 | length 35.5
  Top Layer w0.4: U1.13 119.325,80.525 120.1,79.75 v1(120.125,79.75)
  Top Layer w0.5: v1(125.3,79.8) 126,79.1 134.2,79.1 136.2,81.1 136.2,88.194 135.689,88.706 134.564,88.706 J6.1 ; R19.2 133.85,87.95 134.55,88.65
  Bottom Layer w0.3: v1@125.25,79.75 v1(125.3,79.8)
  Bottom Layer w0.4: v1(120.125,79.75) v1@125.25,79.75
NetP1_2: P1.2 R15.1 U1.17 | length 20.3
  Top Layer w0.35: v1(115.807,82.882) 115.862,82.882 116.104,83.125 119.45,83.125 120.425,84.1 R15.1@122.075,84.1
  Bottom Layer w0.35: P1.2@106.425,91.25 106.44,91.235 106.44,90.235 107.5,89.175 109.48,89.175 115,83.655 115,83.57 115.495,83.075 115.547,83.075 115.74,82.882 v1(115.807,82.882)
NetP2_3: P2.3 R17.2 U1.7 | length 17
  Top Layer w0.4: R17.2 110.023,80.923 110.823,80.923 110.875,80.975 111.075,81.175 U1.7 114.05,81.175 115.075,82.2 115.075,84.625 119.96,89.51 P2.3@119.96,91.5
NetQ1_2: Q1.2 Q1.5 | length 2.2
  Top Layer w0.6: Q1.2@120.45,65.3 Q1.5
NetR7_1: R7.1 R8.2 U2.3 | length 4.3
  Top Layer w0.4: R8.2 R8.2@102.4,53.6 ; R7.1 102.375,54.925 102.375,53.625 R8.2@102.4,53.6 ; U2.3@105.1,54 103.7,54 103.3,53.6 R8.2@102.4,53.6
NetR9_2: R9.2 U3.2 | length 2
  Top Layer w0.5: R9.2@131,63.925 131.005,63.92 131.005,63.153 131.298,62.86 131.335,62.86 131.385,62.81 U3.2
NetR10_1: R10.1 U3.6 | length 3.1
  Top Layer w0.3: R10.1 128,54.75 128.85,55.6 129.6,55.6 129.965,55.965 129.965,56.34 130.025,56.4 U3.6@130.1,56.4
NetR11_1: R11.1 U3.7 | length 3.1
  Top Layer w0.3: U3.7@131.4,56.5 131.4,55.776 131.576,55.6 132.4,55.6 133.25,54.75 R11.1
NetR16_1: R16.1 U1.12 | length 12.8
  Top Layer w0.3: U1.12 118.875,79.875 119.25,79.5 v1(119.275,79.5)
  Top Layer w0.4: R16.1@115.306,88.844 115.357,88.793 115.357,88.018 v1(115.85,87.525)
  Bottom Layer w0.4: v1@115.825,87.6 115.85,87.6 117.209,86.241 117.209,81.566 v1(119.275,79.5)
NetR18_1: R18.1 U1.14 | length 6.1
  Top Layer w0.35: R18.1@115.225,77.2 115.225,80.575 115.825,81.175 U1.14
pads on no net: B1.4 J1.6 J1.MH J2.A6 J2.A7 J2.A8 J2.B6 J2.B7 J2.B8 J2.MH J2.SH U1.8 U1.9 U1.10 U1.11 U2.6 U3.9

## Polygon pours and split planes (outlines as drawn)
BAT_IN_POS on Top Layer "BAT_IN_POS_L01_P005" (solid, pour order 5): 123.65,55.625 123.9,55.375 125.375,55.375 127.075,57.075 127.075,57.85 127.475,58.25 129.275,58.25 129.525,58 129.525,56.225 129.5,56.2 129.25,55.95 128.05,55.95 126.106,54.006 122.718,53.993 121.975,53.25 114,53.25 113.55,53.7 113.55,56.125 114.025,56.6 116.6,56.6 117.65,55.55 119.675,55.55 121.775,57.65 123.275,57.65 123.65,57.275
BAT_IN_NEG on Top Layer "BAT_IN_NEG_L01_P006" (solid, pour order 6): 118.975,64.9 119.09,64.785 120.811,64.764 121.025,64.55 121.025,64 120.85,63.825 118.761,63.825 117.975,62.795 117.975,60.6 118.275,60.3 120.825,60.3 121.025,60.1 121.025,59.025 121.125,58.925 124.25,58.925 125.45,57.725 125.45,55.8 125.225,55.575 124.1,55.575 123.85,55.825 123.85,57.4 123.4,57.85 119.384,57.85 118.8,58.518 118.8,59 118.55,59.25 117.375,59.25 116.175,60.45 116.175,64.725 116.55,65.1 118.8,65.1 118.95,64.925
GND on Top Layer "GND_L01_P016" (solid, pour order 16): 99.9,78.6 100.1,78.4 100.1,77.4 100.5,77 101.8,77 102.1,76.7 102.1,75.1 101.9,74.9 100.1,74.9 99,76 97.225,76 96.9,76.325 96.9,78.4 97.1,78.6
+5 on Top Layer "+5_L01_P001" (solid, pour order 1): 103.073,57.202 103.3,56.975 103.3,56 103,55.7 100.2,55.7 96.9,59 96.9,70.475 97.4,70.975 98.95,70.975 100.1,72.125 101.775,72.125 102.175,71.725 102.175,69.65 102.875,68.95 105.375,68.95 105.929,68.396 105.929,64.729 105.475,64.275 102.275,64.275 100.975,62.975 101.001,57.776 101.575,57.202
NetC11_1 on Top Layer "NETC11_1_L01_P004" (solid, pour order 4): 105.75,51.8 105.75,52.75 106.6,53.6 106.6,55.125 106.875,55.4 108.8,55.4 109.175,55.775 109.175,61.025 110.075,61.925 113.4,61.925 114.175,61.15 114.175,57.15 113.2,56.175 113.2,53.325 113.075,53.2 109.025,53.2 109.025,52.375 108.125,51.475 106.075,51.475
NetC9_2 on Top Layer "NetC9_2" (solid, pour order 7): 129.2,67.2 129.3,67.1 130.4,67.1 130.9,66.6 130.9,65.7 130.8,65.6 128.9,65.6 127.8,66.7 127.784,66.7 127.675,66.809 127.675,70 132.251,70 132.242,69.425 132.208,69.4 129.8,69.4 129.2,68.8
+5_IN on Top Layer "+5_IN_L01_P008" (solid, pour order 8): 125.9,70.188 127.225,70.188 127.425,69.988 127.425,66.763 129.225,64.963 129.225,61.225 129.105,61.075 128.6,61.075 128.475,61.2 128.475,63.412 125.741,66.146 125.725,70.013
+3V3 on Top Layer "+3V3" (solid, remove dead copper, pour order 2): 99.9,74.7 98.875,75.725 97.15,75.725 96.8,75.375 96.8,73.975 97.25,73.525 99.025,73.525 100.225,72.325 102.575,72.325 103.9,71 108.35,71 108.7,71.35 108.7,75.525 108.25,75.975 103.875,75.975 102.6,74.7
NetD2_A on Top Layer "NETD2_A_L01_P003" (solid, pour order 3): 108.7,61.777 109.697,62.725 113.1,62.725 114.275,63.9 114.275,66.375 113.5,67.15 109.45,67.15 106.1,63.8 102.175,63.8 101.4,63.025 101.4,57.9 101.9,57.4 103.6,57.4 103.775,57.225 103.775,56.225 104.55,55.45 105.95,55.45 108.7,58.2
GND on Bottom Layer "GND_L02_P015" (solid, pour order 15): 95.75,91.75 cw(c97.5,91.75) 96.917,93.4 136.99,93.4 cw(c136.5,92.25) 137.75,92.25 137.75,52 cw(c137,52) 137,51.25 96.75,51.25 cw(c96.75,52.25) 95.75,52.25
NetC9_2 on Bottom Layer "NETC9_2_L02_P014" (solid, pour order 14): 127.7,74.3 127.5,74.5 127.5,75.2 128.1,75.8 129.1,75.8 130,74.9 130,69.587 129.2,68.787 129.2,67.2 129.3,67.1 130.4,67.1 130.9,66.6 130.9,65.7 130.8,65.6 128.9,65.6 128.4,66.1 128.4,74 128.1,74.3

## Silkscreen, mask and mechanical layers (free items; w line width, h text height)
Top Overlay:
  text "IN" at 119.254,92.904 h0.75
  text "3V3" at 121.479,92.904 h0.75
  text "GND" at 124.104,92.904 h0.75
  text "LED" at 111.804,92.879 h0.75
  text "GND" at 114.654,92.879 h0.75
  text "GND" at 128.354,92.879 h0.75
  text "IN" at 131.429,92.854 h0.75
  text "SCK" at 105.554,92.829 h0.75
  text "GND" at 100.379,92.804 h0.75
  text "3V3" at 103.004,92.804 h0.75
  text "SDA" at 108.154,92.779 h0.75
  text "OLED" at 103.629,88.879 h0.75
  text "Pulsador" at 128.229,88.829 h0.75
  text "IR Sensor" at 119.279,88.679 h0.75
  text "SWD" at 134.429,80.604 h1
  text "USB" at 134.679,65.129 h1
  text "-" at 124.204,57.904 h1
  text "+" at 122.204,57.812 h1
  text "ON/OFF SW" at 110.104,56.704 h0.75
  text "BAT" at 117.704,51.829 h1
Mechanical 15:
  the board outline again, w0.254

## Text inside footprints (layer, text, board x,y; h text height)
D1: Mechanical 13 "+" at 116.158,75.575 h1 r180
D3: Mechanical 13 "+" at 127.433,52.292 h0.5 r180
D4: Mechanical 13 "+" at 133.817,53.508 h0.5
D5: Mechanical 13 "+" at 103.967,79.8 h1